# EAGLE board 203_color (EAGLE 7.6.0)
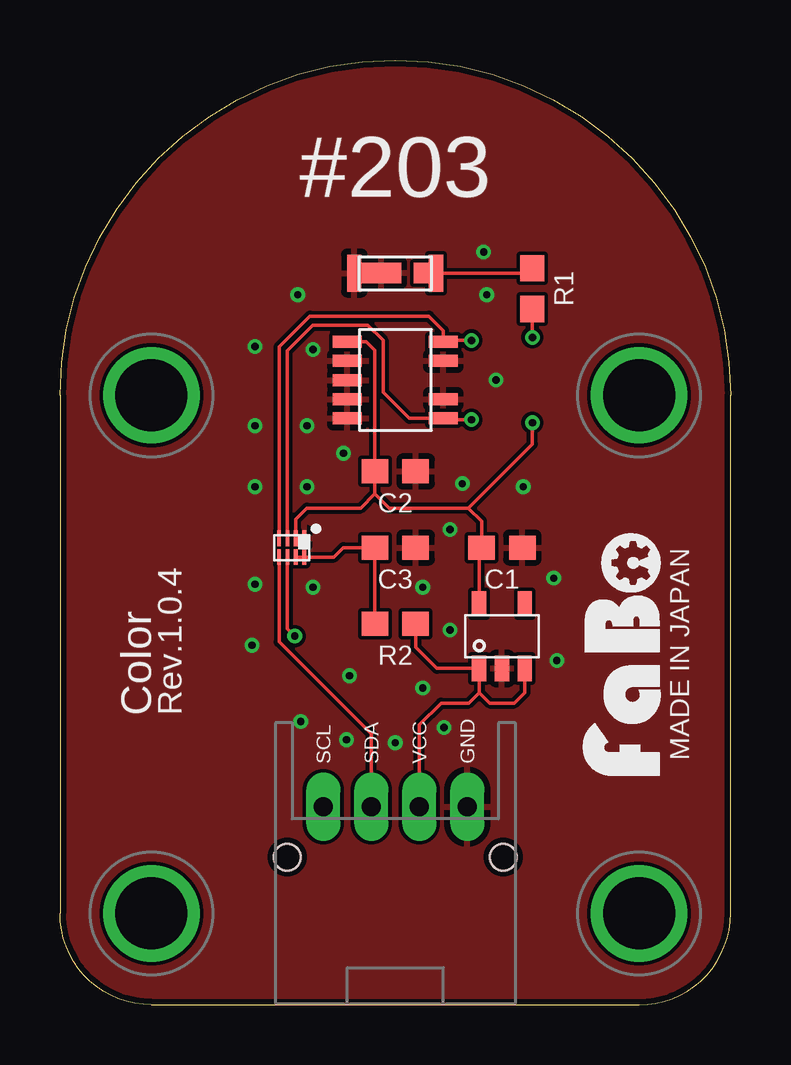
[diagram p0: board, top side]
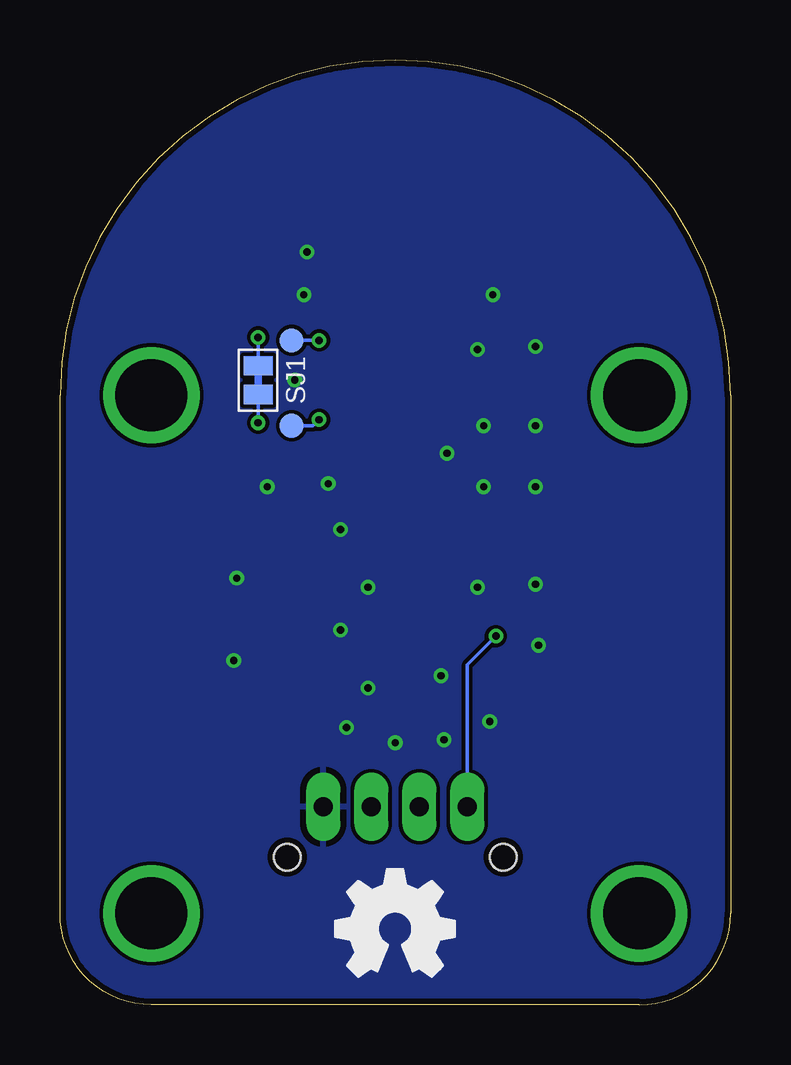
[diagram p1: board, bottom side, seen from below]

Size 27.94 x 39.37 mm. Coordinates in mm from the lower left corner, seen from the top.
Copper layers (1*16): Top 0.035mm / dielectric 1.5mm / Bottom 0.035mm
Design rules "SeeedStudio_2layer_DRU_no_angle_20140221": minimum track width 6mil, minimum drill 12mil, track to track 6mil, track to pad 6mil, pad to pad 6mil, via to via 6mil, smd to smd 0mil, copper to edge 10mil, drill to drill 10mil, minimum pad ring 10mil, minimum via ring 6mil, stop-mask expansion 2mil, vias tented up to drill 100mil, thermal gap 10mil

## Footprints (pad centres in the part's own frame; a part is rotated, then mirrored left to right if it is on the bottom)
0603 = smd 1.1 x 1: 1 -0.85,0; 2 0.85,0
HAMAMATSU-S11059 = smd 1.2 x 0.5: 1 -2,1.6; 2 -2,0.8; 3 -2,0; 4 -2,-0.8; 5 -2,-1.6; 6 2,-1.6; 7 2,-0.8; 8 2,0.8; 9 2,1.6
TI-LP2985 = smd 0.6 x 1.05: 1 -0.95,-1.35; 2 0,-1.35; 3 0.95,-1.35; 4 0.95,1.35; 5 -0.95,1.35
X2SON = smd 0.2 x 0.65: 1 -0.525,-0.395; 2 -0.175,-0.395; 3 0.175,-0.395; 4 0.525,-0.395; 5 0.525,0.395; 6 0.175,0.395; 7 -0.175,0.395; 8 -0.525,0.395
FABO_BRICK_I2C = drill 0.8 pad 1.422 long: GND 3,-10.795; SCL -3,-10.795; SDA -1,-10.795; VCC 1,-10.795 | drill 3 pad 3.81: P$1 -10.16,6.35; P$2 10.16,6.35; P$3 -10.16,-15.24; P$4 10.16,-15.24 | hole 1.1: -4.5,-12.895; 4.5,-12.895
NSSW157T = smd 0.6 x 1.55: ANODE1 1.7,0.01; CATHODE2 -1.71,0.01 | smd 0.64 x 0.86: ANODE2 1.08,0.01 | smd 1.66 x 0.86: CATHODE1 -0.59,0.02
SMD-JUMPER-2-CLOSE = smd 0.8 x 1.2: 1 -0.6,0; 2 0.6,0
TP-10 = smd 1 x 1: 1 0,0

## Placement (x,y rotation side)
C1  1uF  [0603]  18.41,19.05 180 top
C2  0.1uF  [0603]  13.97,22.23 180 top
C3  0.1uF  [0603]  13.97,19.05 180 top
IC1  [HAMAMATSU-S11059]  13.97,26.04 0 top
IC2  [TI-LP2985]  18.41,15.37 0 top
IC3  [X2SON]  9.65,19.05 180 top
J1  [FABO_BRICK_I2C]  13.97,19.05 0 top
LED  NSSW157T  [NSSW157T]  13.97,30.48 0 top
R1  [0603]  19.68,29.84 270 top
R2  200k  [0603]  13.97,15.88 0 top
SJ1  CLOSE  [SMD-JUMPER-2-CLOSE]  19.68,26.04 90 bottom
TP1  [TP-10]  18.29,27.69 0 bottom
TP2  [TP-10]  18.29,24.13 0 bottom
U$2  [LOGO_OSHW_M_BOTTOM]  13.97,3.17 0 top
U$3  [LOGO_FABO_MS]  25.4,14.61 90 top

## Library data of the parts
C1-C3 = FaBo-Capacitor
IC1 = FaBo-Sensor
IC2 SJ1 TP1 TP2 = FaBo-Supply
IC3 = FaBo-LevelTranslator
J1 = FaBo-Template
LED = FaBo-LED
R1 R2 = FaBo-Resistors
U$2 U$3 = FaBo-etc

## Nets
3V3: C1.2 C2.2 IC1.1 IC2.5 IC3.2 SJ1.1
5V: IC2.1 IC2.3 J1.VCC R2.2
GND: C1.1 C2.1 C3.1 IC1.2 IC1.3 IC1.4 IC1.5 IC1.7 IC1.8 IC2.2 IC3.1 J1.GND LED.CATHODE1 LED.CATHODE2
N$1: LED.ANODE1 LED.ANODE2 R1.1
N$2: C3.2 IC3.7 IC3.8 R2.1
N$3: R1.2 SJ1.2
SCL: IC1.6 IC3.3 TP2.1
SCL_HV: IC3.6 J1.SCL
SDA: IC1.9 IC3.4 TP1.1
SDA_HV: IC3.5 J1.SDA

## Tracks (layer width: path | path; a pad name or v marks a point on that pad's centre or on a via)
3V3  (via drill 0.3)
  Top 0.152: 17.02,20.7 17.57,20.15 C1.2 17.46,18.95 IC2.5 | 17.02,20.7 13.72,20.7 13.12,21.3 | 13.12,21.3 C2.2 13.12,27.27 12.75,27.64 IC1.1 | IC3.2 9.83,20.24 10.29,20.7 12.52,20.7 13.12,21.3 | 17.02,20.7 19.68,23.37 v19.68,24.26
  Bottom 0.152: v19.68,24.26 SJ1.1
5V
  Top 0.152: 17.46,13.02 IC2.1 15.7,14.02 14.82,14.9 R2.2 | 17.46,13.02 17.91,12.57 18.92,12.57 19.36,13.02 IC2.3 | J1.VCC 14.97,11.67 15.88,12.57 17.02,12.57 17.46,13.02
GND  (via drill 0.3)
  other vias: 10.54,27.3 10.29,21.59 10.29,24.13 16.76,21.72 18.16,26.04 17.78,29.59 9.91,29.59 8.13,27.43 8.13,21.59 8.13,24.13 8,14.99 8.13,17.53 10.54,17.4 12.06,13.72 19.3,21.59 16.26,19.81 16.26,15.62 16,11.56 11.94,11.05 10.03,11.81 13.97,10.92 11.81,22.99 17.65,31.37 15.11,17.4 20.57,17.78 20.7,14.35 15.11,13.21
  pour Bottom: 0,0 27.94,0 27.94,39.37 0,39.37
  pour Top: 0,0 27.94,0 27.94,39.37 0,39.37
N$1
  Top 0.152: LED.ANODE2 LED.ANODE1 19.48,30.49 R1.1
N$2
  Top 0.152: R2.1 C3.2 11.81,19.05 11.42,18.66 IC3.8 IC3.7
N$3  (via drill 0.3)
  Top 0.152: R1.2 v19.68,27.81
  Bottom 0.152: v19.68,27.81 SJ1.2
SCL  (via drill 0.3)
  Top 0.152: IC3.3 9.48,27.26 10.54,28.32 12.83,28.32 13.46,27.69 13.46,25.53 14.55,24.43 IC1.6 16.08,24.43 16.13,24.38 v17.14,24.38
  Bottom 0.152: TP2.1 17.4,24.13 v17.14,24.38
SCL_HV  (via drill 0.3)
  Top 0.152: IC3.6 9.48,15.67 v9.78,15.37
  Bottom 0.152: J1.SCL 10.97,14.18 v9.78,15.37
SDA  (via drill 0.3)
  Top 0.152: IC3.4 9.13,27.41 10.41,28.7 15.37,28.7 15.97,28.1 IC1.9 15.97,27.65 16,27.69 v17.14,27.69
  Bottom 0.152: v17.14,27.69 TP1.1
SDA_HV
  Top 0.152: IC3.5 9.13,15.13 12.97,11.29 J1.SDA

## Text on the board
tPlace: #203 | MADE IN JAPAN | Color | Rev.1.0.4